# EAGLE board boosterpack_0v1_EAGLE (EAGLE 6.5.0)
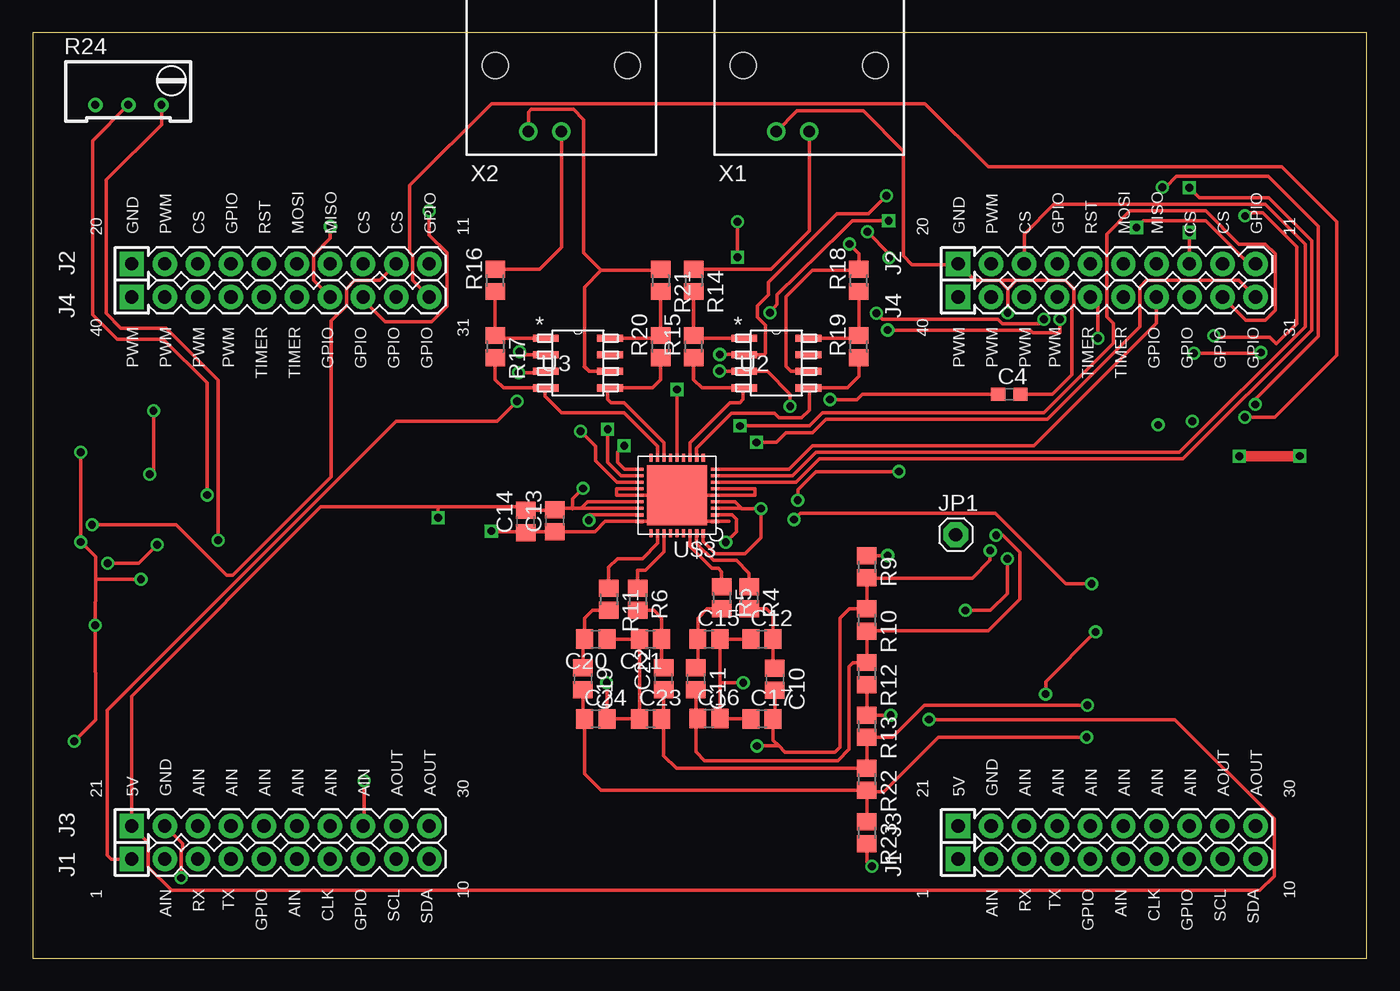
[diagram p0: board, top side]
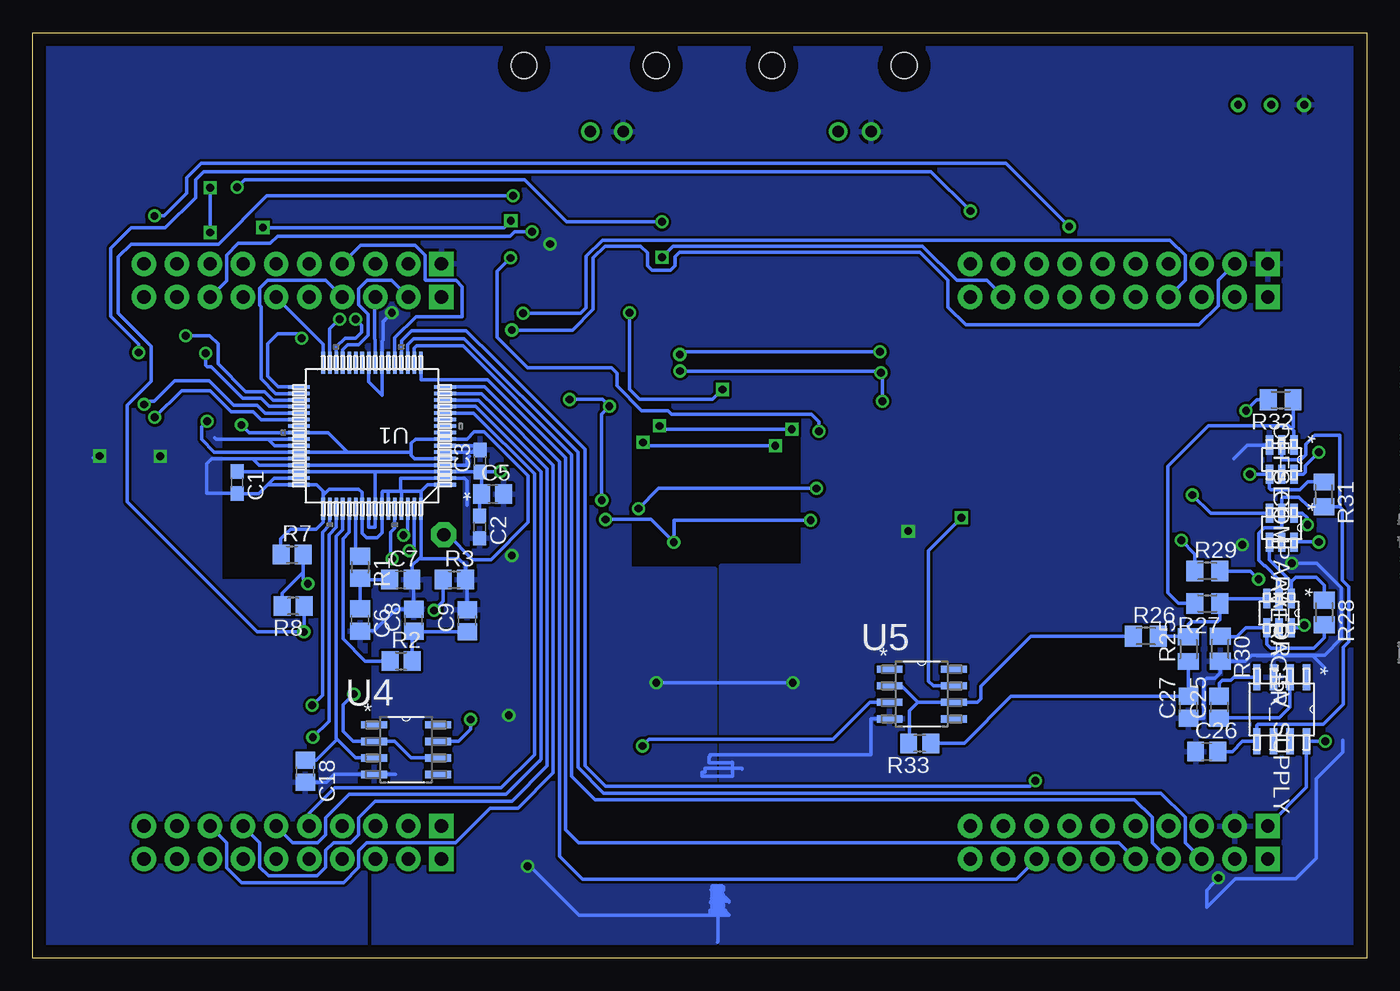
[diagram p1: board, bottom side, seen from below]

Size 102.54 x 71.11 mm. Coordinates in mm from the lower left corner, seen from the top.
Outline: 0,0 102.54,0 102.54,71.11 0,71.11 0,0
Copper layers (1*16): Top 0.035mm / dielectric 1.5mm / Bottom 0.035mm
Design rules "default *": minimum track width 8mil, minimum drill 0.599440625mm, track to track 8mil, track to pad 8mil, pad to pad 8mil, via to via 8mil, smd to smd 8mil, copper to edge 40mil, drill to drill 8mil, minimum pad ring 10mil, minimum via ring 8mil, stop-mask expansion 4mil, vias tented up to drill 0mil, thermal gap 10mil

## Footprints (pad centres in the part's own frame; a part is rotated, then mirrored left to right if it is on the bottom)
D8 = smd 1.981 x 0.559: 1 -2.464,1.905; 2 -2.464,0.635; 3 -2.464,-0.635; 4 -2.464,-1.905; 5 2.464,-1.905; 6 2.464,-0.635; 7 2.464,0.635; 8 2.464,1.905
4X10-BOOSTERPACK = drill 1.016 pad 1.88 square: 1 0,10.16; 20 45.72,10.16; 21 2.54,10.16; 40 43.18,10.16 | drill 1.016 pad 1.88: 2 0,7.62; 3 0,5.08; 4 0,2.54; 5 0,0; 6 0,-2.54; 7 0,-5.08; 8 0,-7.62; 9 0,-10.16; 10 0,-12.7; 11 45.72,-12.7; 12 45.72,-10.16; 13 45.72,-7.62; 14 45.72,-5.08; 15 45.72,-2.54; 16 45.72,0; 17 45.72,2.54; 18 45.72,5.08; 19 45.72,7.62; 22 2.54,7.62; 23 2.54,5.08; 24 2.54,2.54; 25 2.54,0; 26 2.54,-2.54; 27 2.54,-5.08; 28 2.54,-7.62; 29 2.54,-10.16; 30 2.54,-12.7; 31 43.18,-12.7; 32 43.18,-10.16; 33 43.18,-7.62; 34 43.18,-5.08; 35 43.18,-2.54; 36 43.18,0; 37 43.18,2.54; 38 43.18,5.08; 39 43.18,7.62
DBV6 = smd 1.473 x 0.559: 1 -1.118,0.94; 2 -1.118,0; 3 -1.118,-0.94; 4 1.118,-0.94; 5 1.118,0; 6 1.118,0.94
C0603 = smd 1.1 x 1: 1 -0.85,0; 2 0.85,0
C0805 = smd 1.3 x 1.5: 1 -0.85,0; 2 0.85,0
1X01 = drill 1.016 pad 1.93 octagon: 1 0,0
R0805 = smd 1.3 x 1.5: 1 -0.85,0; 2 0.85,0
RTRIM64W = drill 0.61: 1 1.27,-2.54; 2 1.27,0; 3 1.27,2.54
M0805 = smd 1.3 x 1.6: 1 -0.95,0; 2 0.95,0
PAG64 = smd 1.676 x 0.279: 1 -5.613,3.759; 2 -5.613,3.251; 3 -5.613,2.743; 4 -5.613,2.261; 5 -5.613,1.753; 6 -5.613,1.245; 7 -5.613,0.762; 8 -5.613,0.254; 9 -5.613,-0.254; 10 -5.613,-0.762; 11 -5.613,-1.245; 12 -5.613,-1.753; 13 -5.613,-2.261; 14 -5.613,-2.743; 15 -5.613,-3.251; 16 -5.613,-3.759; 33 5.613,-3.759; 34 5.613,-3.251; 35 5.613,-2.743; 36 5.613,-2.261; 37 5.613,-1.753; 38 5.613,-1.245; 39 5.613,-0.762; 40 5.613,-0.254; 41 5.613,0.254; 42 5.613,0.762; 43 5.613,1.245; 44 5.613,1.753; 45 5.613,2.261; 46 5.613,2.743; 47 5.613,3.251; 48 5.613,3.759 | smd 0.279 x 1.676: 17 -3.759,-5.613; 18 -3.251,-5.613; 19 -2.743,-5.613; 20 -2.261,-5.613; 21 -1.753,-5.613; 22 -1.245,-5.613; 23 -0.762,-5.613; 24 -0.254,-5.613; 25 0.254,-5.613; 26 0.762,-5.613; 27 1.245,-5.613; 28 1.753,-5.613; 29 2.261,-5.613; 30 2.743,-5.613; 31 3.251,-5.613; 32 3.759,-5.613; 49 3.759,5.613; 50 3.251,5.613; 51 2.743,5.613; 52 2.261,5.613; 53 1.753,5.613; 54 1.245,5.613; 55 0.762,5.613; 56 0.254,5.613; 57 -0.254,5.613; 58 -0.762,5.613; 59 -1.245,5.613; 60 -1.753,5.613; 61 -2.261,5.613; 62 -2.743,5.613; 63 -3.251,5.613; 64 -3.759,5.613
SOIC127P600X175-8N = smd 1.981 x 0.559: 1 -2.464,1.905; 2 -2.464,0.635; 3 -2.464,-0.635; 4 -2.464,-1.905; 5 2.464,-1.905; 6 2.464,-0.635; 7 2.464,0.635; 8 2.464,1.905
WQFN-36-NJK = smd 0.6 x 0.25: P$1 -2.9,2; P$2 -2.9,1.5; P$3 -2.9,1; P$4 -2.9,0.5; P$5 -2.9,0; P$6 -2.9,-0.5; P$7 -2.9,-1; P$8 -2.9,-1.5; P$9 -2.9,-2; P$19 2.9,-2; P$20 2.9,-1.5; P$21 2.9,-1; P$22 2.9,-0.5; P$23 2.9,0; P$24 2.9,0.5; P$25 2.9,1; P$26 2.9,1.5; P$27 2.9,2 | smd 0.25 x 0.6: P$10 -2,-2.9; P$11 -1.5,-2.9; P$12 -1,-2.9; P$13 -0.5,-2.9; P$14 0,-2.9; P$15 0.5,-2.9; P$16 1,-2.9; P$17 1.5,-2.9; P$18 2,-2.9; P$28 2,2.9; P$29 1.5,2.9; P$30 1,2.9; P$31 0.5,2.9; P$32 0,2.9; P$33 -0.5,2.9; P$34 -1,2.9; P$35 -1.5,2.9; P$36 -2,2.9 | smd 4.6 x 4.6: TH 0,0
AMP_227161 = drill 0.9 pad 1.27: 1 0,-5.08; 2 -2.54,-5.08 | hole 2: -5.08,0; 5.08,0

## Placement (x,y rotation side)
-5V_SUPPLY  TL7660_D_8  [D8]  6.55,19.13 270 bottom
A1  [4X10-BOOSTERPACK]  81.28,7.62 90 top
A2  [4X10-BOOSTERPACK]  17.78,7.62 90 top
AVERAGER  OPA890_DBV_6  [DBV6]  6.76,26.52 270 bottom
C1  0.1uF  [C0603]  86.82,36.55 270 bottom
C2  0.1uF  [C0603]  68.17,33.12 270 bottom
C3  0.1uF  [C0603]  68.15,38.2 90 bottom
C4  0.1uF  [C0603]  75.06,43.33 0 top
C5  10u  [C0805]  67.18,35.66 0 bottom
C6  0.1u  [C0805]  77.37,25.98 270 bottom
C7  2.2u  [C0805]  74.24,29.08 0 bottom
C8  0.1u  [C0805]  73.25,25.96 90 bottom
C9  2.2u  [C0805]  69.14,25.93 90 bottom
C10  1000p  [C0805]  57.05,21.44 270 top
C11  1000p  [C0805]  50.98,21.46 270 top
C12  1000p  [C0805]  56.06,24.51 0 top
C13  1000p  [C0805]  40.13,33.6 90 top
C14  1000p  [C0805]  37.9,33.55 90 top
C15  1000p  [C0805]  51.97,24.51 0 top
C16  1000p  [C0805]  51.97,18.41 0 top
C17  1000p  [C0805]  56.06,18.39 0 top
C18  0.1u  [C0805]  81.58,14.38 270 bottom
C19  1000p  [C0805]  42.29,21.46 270 top
C20  1000p  [C0805]  43.28,24.51 180 top
C21  1000p  [C0805]  47.5,24.51 180 top
C22  1000p  [C0805]  48.49,21.46 90 top
C23  1000p  [C0805]  47.5,18.39 0 top
C24  1000p  [C0805]  43.28,18.39 0 top
C25  10uf  [C0805]  11.35,19.28 90 bottom
C26  10uf  [C0805]  12.32,15.88 0 bottom
C27  1000p  [C0805]  13.72,19.28 90 bottom
COMPARATOR  OPA890_DBV_6  [DBV6]  6.55,33.07 270 bottom
JP1  [1X01]  70.94,32.54 0 top
OFFSET  OPA890_DBV_6  [DBV6]  6.55,38.3 270 bottom
R1  2  [R0805]  77.37,30.05 270 bottom
R2  2  [R0805]  74.22,22.83 0 bottom
R3  56k  [R0805]  70.13,29.08 0 bottom
R4  50  [R0805]  55.07,27.69 270 top
R5  50  [R0805]  52.96,27.69 270 top
R6  50  [R0805]  46.51,27.58 270 top
R7  1k  [R0805]  82.6,31.01 0 bottom
R8  200  [R0805]  82.52,27.05 180 bottom
R9  75  [R0805]  64.11,30.07 270 top
R10  300  [R0805]  64.11,25.98 270 top
R11  50  [R0805]  44.27,27.58 270 top
R12  75  [R0805]  64.11,21.87 270 top
R13  75  [R0805]  64.11,17.83 270 top
R14  1k  [R0805]  50.8,52.07 270 top
R15  1k  [R0805]  50.8,46.99 90 top
R16  1k  [R0805]  35.56,52.07 90 top
R17  1k  [R0805]  35.56,46.99 270 top
R18  1k  [R0805]  63.5,52.07 90 top
R19  1k  [R0805]  63.5,46.99 90 top
R20  1k  [R0805]  48.26,46.99 90 top
R21  1k  [R0805]  48.26,52.07 270 top
R22  300  [R0805]  64.11,13.74 270 top
R23  75  [R0805]  64.11,9.65 270 top
R24  10k  [RTRIM64W]  7.37,66.83 270 top
R25  1k  [M0805]  13.72,23.75 90 bottom
R26  1k  [M0805]  16.99,24.74 0 bottom
R27  1k  [M0805]  12.27,27.25 180 bottom
R28  7.5k  [M0805]  3.28,26.57 270 bottom
R29  2.5k  [M0805]  12.27,29.74 0 bottom
R30  10k  [M0805]  11.28,23.77 270 bottom
R31  5k  [M0805]  3.3,35.64 270 bottom
R32  4k  [M0805]  6.63,42.9 180 bottom
R33  100  [R0805]  34.37,16.51 180 bottom
U1  ADS5237_PAG_64  [PAG64]  76.45,40.13 180 bottom
U2  THS4121_D_8  [D8]  57.15,45.72 0 top
U3  THS4121_D_8  [D8]  41.91,45.72 0 top
U4  OPA140AID  [SOIC127P600X175-8N]  73.84,16.03 0 bottom
U5  OPA140AID  [SOIC127P600X175-8N]  34.21,20.29 0 bottom
U$3  LMH6882  [WQFN-36-NJK]  49.53,35.56 180 top
X1  1-227161-0  [AMP_227161]  59.69,68.58 0 top
X2  1-227161-0  [AMP_227161]  40.64,68.58 0 top

## Library data of the parts
-5V_SUPPLY = TL7660; DATASHEETURL: http://www.ti.com/lit/gpn/TL7660; DESCRIPTION: CMOS Voltage Converter; FAMILY_NAME: LOW POWER; GENERIC_PART_NUMBER: TL7660; INDUSTRY_STD_PKG_TYPE: SOIC; MANUFACTURER: Texas Instruments; MANUFACTURER_PART_NUMBER: tl7660_d_8; PACKAGE_DESIGNATOR: D; PIN_COUNT: 8; VENDOR: Texas Instruments
A1 A2 = EAGLE_BoosterPack_Library
AVERAGER COMPARATOR OFFSET = OPA890; DATASHEETURL: http://www.ti.com/lit/gpn/OPA890; DESCRIPTION: Low Power, Wideband, Voltage Feedback Operational Amplifier with Disable; FAMILY_NAME: VOLTAGE FEEDBACK; GENERIC_PART_NUMBER: OPA890; INDUSTRY_STD_PKG_TYPE: SOT-23; MANUFACTURER: Texas Instruments; MANUFACTURER_PART_NUMBER: opa890_dbv_6; PACKAGE_DESIGNATOR: DBV; PIN_COUNT: 6; VENDOR: Texas Instruments
C1-C4 JP1 = adafruit
C5 = resistor; C: 10uF
C6-C17 C19-C27 R1-R33 = resistor
C18 = resistor; C: 0.1uF
U1 = ADC; DATASHEETURL: http://www.ti.com/lit/gpn/ADS5237; DESCRIPTION: Dual, 10-Bit, 65MSPS, +3.3V Analog-to-Digital Converter; FAMILY_NAME: HIGH SPEED ADC (>10MSPS); GENERIC_PART_NUMBER: ADS5237; INDUSTRY_STD_PKG_TYPE: TQFP; MANUFACTURER: Texas Instruments; PACKAGE_DESIGNATOR: PAG; PIN_COUNT: 64
U2 U3 = ADC; DATASHEETURL: http://www.ti.com/lit/gpn/THS4121; DESCRIPTION: 3.3 V, 100 MHz, 43 V/us, Fully Differential CMOS Amplifier; FAMILY_NAME: FULLY DIFFERENTIAL AMPLIFIER; GENERIC_PART_NUMBER: THS4121; INDUSTRY_STD_PKG_TYPE: SOIC; MANUFACTURER: Texas Instruments; MANUFACTURER_PART_NUMBER: ths4121_d_8; PACKAGE_DESIGNATOR: D; PIN_COUNT: 8; VENDOR: Texas Instruments
U4 U5 = Texas Instruments_By_element14_Batch_1; MPN: OPA140AID; OC_FARNELL: 1855117; OC_NEWARK: 13T8920; PACKAGE: SOIC-8; SUPPLIER: Texas Instruments
U$3 = lmh6882
X1 X2 = con-coax; MF: TYCO ELECTRONICS; MPN: 1-227161; OC_FARNELL: unknown; OC_NEWARK: 33B3200

## Nets
3.3V: A2.1 C1.1 C2.1 C3.1 C4.1 C5.1 U1.3 U1.46 U1.56 U1.57 U2.3 U3.3
A0: A1.25 U1.12
A1: A1.26 U1.13
A2: A1.27 U1.14
A3: A1.28 U1.15
A4: A2.8 U1.16
A5: A2.5 U1.17
A6: A2.4 U1.18
A7: A2.3 U1.19
A8: A2.28 U1.20
A9: A1.17 U1.21
B0: A1.39 U1.29
B1: A2.37 U1.30
B2: A2.19 U1.31
B3: A1.35 U1.32
B4: A1.36 U1.33
B5: A1.37 U1.34
B6: A2.34 U1.35
B7: A2.33 U1.36
B8: A2.32 U1.37
B9: A2.31 U1.38
C0: A1.11 U$3.P$14
C1: A1.13 U$3.P$7
C2: A1.18 U$3.P$8
C3: A1.34 U$3.P$9
C4: A1.33 U$3.P$21
C5: A1.32 U$3.P$20
C6: A1.31 U$3.P$19
GND: -5V_SUPPLY.3 A1.20 A2.20 A2.22 C1.2 C2.2 C3.2 C4.2 C5.2 C6.2 C7.2 C8.2 C9.2 C12.1 C13.1 C14.1 C15.2 C16.2 C17.1 C18.2 C20.1 C21.2 C23.1 C24.2 C26.1 C27.1 OFFSET.3 R3.2 R7.1 R9.1 R12.2 R13.1 R18.2 R21.1 R23.2 R24.1 R30.2 U1.1 U1.2 U1.4 U1.6 U1.7 U1.23 U1.25 U1.41 U1.42 U1.44 U1.45 U1.47 U1.48 U1.49 U1.55 U1.58 U1.59 U1.61 U1.64 U2.6 U3.6 U4.4 U5.4 U$3.P$1 U$3.P$5 U$3.P$6 U$3.P$22 U$3.P$23 U$3.P$27 U$3.TH X1.2 X2.2
N$1: A1.38 U1.24
N$2: JP1.1 U1.5 U1.8 U1.40 U1.43
N$3: C18.1 U1.52 U4.3
N$4: C19.2 C24.1 R22.2 R23.1 U1.51
N$5: R24.3 R29.1
N$6: COMPARATOR.3 R24.2
N$7: AVERAGER.4 R28.2 R30.1
N$8: C11.1 C15.1 R5.2
N$9: R8.1 U2.2 U3.2 U4.2 U4.6
N$10: R7.2 R8.2 U$3.P$2 U$3.P$26
N$11: AVERAGER.3 R25.2 R26.2 R27.1
N$13: C11.2 C16.1 R10.2 R12.1 U1.62
N$14: C21.1 C22.2 R6.2
N$15: C19.1 C20.2 R11.2
N$16: AVERAGER.1 COMPARATOR.4 R28.1
N$17: C22.1 C23.2 R13.2 R22.1 U1.50
N$18: OFFSET.1 R27.2 R32.1
N$20: OFFSET.4 R31.1 R32.2
N$21: R5.1 U$3.P$34
N$22: R26.1 R33.2 U5.2 U5.6
N$23: -5V_SUPPLY.2 C25.1
N$24: -5V_SUPPLY.4 C25.2
N$25: -5V_SUPPLY.5 AVERAGER.2 C26.2 COMPARATOR.2 OFFSET.2 R31.2
N$26: C10.2 C17.2 R9.2 R10.1 U1.63 U5.3
N$27: R4.1 U$3.P$35
N$29: C6.1 C7.1 R1.2
N$30: C8.1 C9.1 R2.2
N$31: R1.1 U1.54
N$32: R2.1 U1.53
N$33: R3.1 U1.60
N$34: R14.1 X1.1
N$41: R6.1 U$3.P$30
N$42: R14.2 R15.2 U2.1
N$43: R15.1 U2.4 U$3.P$12
N$44: R16.1 R17.1 U3.1
N$47: R17.2 U3.4 U$3.P$17
N$48: R18.1 R19.2 U2.8
N$49: R20.2 R21.2 U3.8
N$51: R16.2 X2.1
N$59: R20.1 U3.5 U$3.P$16
N$60: R19.1 U2.5 U$3.P$11
N$62: R11.1 U$3.P$29
N$67: C10.1 C12.2 R4.2
OUTPUT: A2.12 COMPARATOR.1
SIGNAL1: C27.2 R25.1 R33.1
VCC: -5V_SUPPLY.8 A2.21 AVERAGER.6 C13.2 C14.2 COMPARATOR.6 OFFSET.6 R29.2 U4.7 U5.7 U$3.P$3 U$3.P$4 U$3.P$24 U$3.P$25 U$3.P$36

## Tracks (layer width: path | path; a pad name or v marks a point on that pad's centre or on a via)
3.3V  (via drill 0.6)
  Top 0.254: A2.1 6.04,7.62 5.74,7.93 5.74,19.05 27.94,41.25 35.69,41.25 v37.24,42.8 | v37.34,44.98 39.34,44.98 U3.3 | v52.78,45.11 52.81,45.09 U2.3 56.46,45.09 58.22,43.33 v58.22,42.39 | v61.27,42.93 61.29,42.9 63.35,42.9 63.78,43.33 C4.1 | v66.57,37.39 60.2,37.39 58.8,35.99 v58.8,35.18
  Bottom 0.254: C1.1 86.81,37.39 U1.46 76.2,37.39 | C2.1 68.17,35.52 C5.1 68.03,37.24 C3.1 68.19,37.39 | 68.19,37.39 U1.3 76.2,37.39 | v37.24,42.8 37.24,44.88 v37.34,44.98 37.47,45.11 v52.78,45.11 | U1.57 76.22,34.54 76.2,34.54 U1.57 | U1.57 76.2,33.12 76.71,33.12 U1.56 | 76.2,37.39 U1.57 | v61.27,42.93 58.75,42.93 v58.22,42.39 58.8,41.81 v58.8,35.18 | 68.19,37.39 v66.57,37.39
A0
  Bottom 0.254: A1.25 81.28,11.12 79.32,13.08 66.52,13.08 63.98,15.65 63.98,37.24 68.63,41.88 U1.12
A1
  Bottom 0.254: A1.26 82.55,8.89 80.62,8.89 80.01,9.5 80.01,10.8 78.21,12.6 66.17,12.6 63.76,14.98 | 63.76,14.98 63.55,15.19 | 63.76,14.98 63.48,15.27 63.48,37.39 68.48,42.39 U1.13
A2
  Bottom 0.254: A1.27 85.09,8.89 85.09,7.01 84.4,6.32 80.67,6.32 80.01,6.98 80.01,8.28 79.4,8.89 78.11,8.89 77.5,9.5 77.47,9.5 77.47,10.8 76.2,12.07 65.71,12.07 63.02,14.81 63.02,37.62 68.28,42.88 U1.14
A3
  Bottom 0.254: A1.28 87.63,8.89 87.63,6.96 86.49,5.82 78.64,5.82 77.47,6.98 77.47,8.25 76.86,8.87 76.86,8.89 70.03,8.89 67.39,11.53 65.23,11.53 62.53,14.25 62.53,37.87 67.03,42.39 68.02,43.38 U1.15
A4
  Bottom 0.254: A2.8 26.95,6.07 60.27,6.07 62.05,7.85 62.05,38.12 67.82,43.89 U1.16
A5
  Bottom 0.254: A2.5 19.05,8.89 60.58,8.89 61.57,9.88 61.57,38.43 67.59,44.45 72.69,44.45 U1.17
A6
  Bottom 0.254: A2.4 16.51,8.89 16.51,10.82 17.86,12.17 59.31,12.17 61.11,13.97 61.11,38.68 69.47,47.04 73.03,47.04 73.2,46.86 U1.18
A7
  Bottom 0.254: A2.3 13.97,8.89 13.97,10.82 15.82,12.68 58.65,12.68 60.63,14.66 60.63,38.86 69.37,47.6 73.25,47.6 73.71,47.14 U1.19
A8  (via drill 0.6)
  Top 0.254: v25.48,13.64 25.48,10.24 A2.28
  Bottom 0.254: v25.48,13.64 25.91,13.21 58.52,13.21 60.1,14.78 60.1,39.09 68.05,47.04 68.15,47.14 69.22,48.21 73.41,48.21 74.19,47.42 U1.20
A9
  Bottom 0.254: A1.17 77.32,54.76 73.15,54.76 72.39,54 72.39,52.12 72.34,52.07 70,52.07 69.52,51.59 69.52,49.28 73.08,49.28 74.7,47.65 U1.21
B0
  Bottom 0.254: A1.39 74.93,52.07 76.83,52.07 77.47,51.44 77.47,50.19 76.76,49.48 76.76,47.85 77.47,47.14 78.33,47.14 78.72,46.76 U1.29
B1  (via drill 0.6)
  Top 0.254: v64.85,49.55 65.3,49.1 74.17,49.1 74.52,48.74 77.37,48.74 v77.72,49.1 77.39,48.77
  Bottom 0.254: v77.72,49.1 77.24,48.62 77.24,48.08 77.7,47.62 78.54,47.62 79.2,46.97 U1.30 | v64.85,49.55 60.43,49.55 59.99,49.99 59.99,53.92 58.75,55.17 15.14,55.17 13.97,54 13.97,52.07 A2.37
B2  (via drill 0.6)
  Top 0.254: v78.94,49.1 78.94,48.03 76.89,48.03 76.66,48.26 v65.71,48.26
  Bottom 0.254: U1.31 79.7,48.36 v78.94,49.1 | v65.71,48.26 61.06,48.26 59.46,49.86 59.46,53.8 58.55,54.71 55.83,54.71 55.3,54.18 55.3,53.21 54.94,52.86 53.52,52.86 53.19,53.19 53.19,53.87 52.83,54.23 34.34,54.23 32.18,52.07 32.18,50.01 30.84,48.67 12.9,48.67 11.43,50.14 11.43,52.07 A2.19
B3
  Bottom 0.254: A1.35 83.82,50.77 80.21,47.17 U1.32
B4  (via drill 0.6)
  Top 0.254: v81.86,47.62 81.86,50.22 A1.36
  Bottom 0.254: U1.33 83.67,43.89 84.48,44.7 84.48,47.19 83.69,47.98 82.22,47.98 v81.86,47.62
B5
  Bottom 0.254: U1.34 83.84,43.38 84.96,44.5 84.96,50.04 85.09,50.16 85.09,51.46 84.48,52.07 80.01,52.07 A1.37
B6  (via drill 0.6)
  Top 0.254: v93.17,57.02 93.4,57.25 94.54,57.25 97.13,54.66 97.13,48.74 95.58,47.19 95.07,47.7 90.91,47.7 v90.78,47.83 | v22.89,56.21 22.89,55.3 21.59,54 21.59,52.07 A2.34
  Bottom 0.254: v90.78,47.83 88.92,47.83 88.29,47.19 88.29,45.67 86.16,43.54 84.71,43.54 84.05,42.88 U1.35 | v93.17,57.02 92.43,57.02 90.7,58.75 90.7,59.94 89.59,61.06 27.74,61.06 v22.89,56.21
B7  (via drill 0.6)
  Top 0.254: v89.23,46.48 94.34,46.48 v94.39,46.53 | v30.48,57.4 30.48,55.55 31.85,54.18 31.85,50.09 30.66,48.9 27.1,48.9 25.4,50.6 A2.33
  Bottom 0.254: v94.39,46.53 94.39,47.17 96.55,49.33 96.55,54.53 94.97,56.11 92.33,56.11 90.02,58.42 90.02,59.82 89.41,60.43 33.5,60.43 v30.48,57.4 | v89.23,46.48 89.23,45.54 89.13,45.44 88.8,45.44 86.39,43.03 84.99,43.03 84.35,42.39 U1.36
B8  (via drill 0.6)
  Top 0.254: v54.18,53.85 v54.18,56.57 | v86.82,59.23 87.07,59.23 87.91,60.07 94.94,60.07 98.78,56.24 98.78,47.78 93.95,42.95 v93.95,42.55
  Bottom 0.254: A2.32 29.21,52.07 31.52,52.07 34.16,54.71 53.31,54.71 v54.18,53.85 | v54.18,56.57 61.49,56.57 64.72,59.79 86.26,59.79 v86.82,59.23 | v93.95,42.55 93.7,42.8 93.19,42.8 91.62,44.37 88.95,44.37 87.07,42.49 85.27,42.49 84.66,41.88 U1.37
B9  (via drill 0.6)
  Top 0.254: A2.31 29.21,52.07 29.21,54 28.98,54.23 28.98,59.38 35.26,65.66 68.58,65.66 73.43,60.81 96.01,60.81 100.23,56.59 100.23,46.33 95.45,41.55 v93.14,41.55
  Bottom 0.254: v93.14,41.55 91.08,43.61 88.9,43.61 87.27,41.99 85.57,41.99 84.96,41.38 U1.38
C0  (via drill 0.6)
  Top 0.254: A1.11 93.47,53.34 90.17,56.64 85.34,56.64 v84.84,56.13 | v49.53,43.69 U$3.P$14 | v56.67,49.58 57.2,50.24 57.2,50.98 62.23,55.88 62.99,56.64 v65.79,56.64
  Bottom 0.254: v84.84,56.13 66.29,56.13 v65.79,56.64 | v49.53,43.69 50.29,42.93 55.88,42.93 56.67,43.71 v56.67,49.58
C1  (via drill 0.6)
  Top 0.254: U$3.P$7 58.66,36.56 60.45,38.35 88.39,38.35 98.3,48.26 98.3,55.12 95,58.42 89.66,58.42 v88.9,59.18 | v88.9,55.75 A1.13
  Bottom 0.254: v88.9,59.18 v88.9,55.75
C2
  Top 0.254: U$3.P$8 58.4,37.06 60.2,38.86 88.14,38.86 97.79,48.51 97.79,54.86 94.74,57.91 78.49,57.91 76.2,55.63 A1.18
C3
  Top 0.254: U$3.P$9 58.13,37.56 59.94,39.37 76.96,39.37 86.36,48.77 A1.34
C4  (via drill 0.6)
  Top 0.254: U$3.P$21 44.92,36.56 43.26,38.23 43.26,39.34 v42.11,40.49 | v65.81,53.8 65.81,54.1 v64.16,55.8
  Bottom 0.254: v42.11,40.49 42.11,41.2 42.7,41.78 53.44,41.78 53.72,42.06 55.73,42.06 57.63,43.97 57.63,44.96 58.04,45.36 64.52,45.36 66.85,47.7 66.85,52.76 v65.81,53.8 | v64.16,55.8 65.51,55.8 65.84,55.47 83.72,55.47 84.28,54.91 86.74,54.91 87.63,54 87.63,52.05 A1.33
C5  (via drill 0.6)
  Top 0.254: U$3.P$20 45.24,37.06 44.2,38.1 v44.2,40.64 | v54.36,40.89 59.69,40.89 60.71,41.91 77.72,41.91 83.06,47.24 83.06,48.77 82.55,49.28 82.55,55.63 84.33,57.4 90.17,57.4 92.71,54.86 94.74,54.86 95.5,54.1 95.5,49.78 94.74,49.02 93.22,49.02 A1.32
  Bottom 0.254: v44.2,40.64 54.1,40.64 v54.36,40.89
C6  (via drill 0.6)
  Top 0.254: U$3.P$19 45.5,37.56 44.96,38.1 44.96,38.86 v45.47,39.37 | A1.31 92.71,52.07 85.6,52.07 85.09,51.56 85.09,48.51 77.98,41.4 60.96,41.4 59.94,40.39 57.91,40.39 57.15,39.62 v55.63,39.62
  Bottom 0.254: v45.47,39.37 55.37,39.37 v55.63,39.62
GND  (via drill 0.6)
  Top 0.254: 43.69,52.83 42.42,51.56 42.42,45.47 42.8,45.09 U3.6 42.75,45.09 42.39,45.44 | 43.69,52.83 48.17,52.83 R21.1 | U2.6 58.29,45.09 57.91,45.47 57.91,50.8 59.94,52.83 63.41,52.83 R18.2 63.5,54.13 v62.76,54.86 | 49.03,36.06 U$3.TH | U$3.TH 50.04,35.05 48.55,33.56 U$3.P$27 44,33.56 43.2,32.77 40.14,32.77 C13.1 37.95,32.75 C14.1 37.9,32.77 35.26,32.77 | 50.03,36.06 49.89,35.92 | 49.89,35.92 U$3.TH | 51.53,33.56 51.13,33.96 | 51.13,33.96 U$3.TH | C20.1 C21.2 C23.1 C24.2 44.13,21.15 v44.12,21.16 | C12.1 C15.2 52.82,21.08 | 52.82,21.08 C16.2 52.84,18.39 C17.1 | R12.2 R13.1 65.93,18.68 v65.94,18.67 | v54.61,21.16 52.9,21.16 52.82,21.08 | R9.1 65.26,30.92 v65.71,30.94 | v92.73,38.56 92.81,38.56 92.84,38.58 | X2.2 38.1,65 38.3,65.2 41.55,65.2 42.34,64.41 42.34,54.18 43.69,52.83 | v5.77,30.35 8.15,30.35 v9.58,31.77 | A2.22 11.53,8.79 11.53,8.38 11.43,8.28 v11.43,6.17 | U$3.P$1 53.52,33.56 53.52,33.55 51.13,33.55 51.13,33.96 | U$3.TH U$3.P$23 44.86,35.56 44.86,36.06 U$3.P$22 | U$3.TH 49.89,35.56 49.89,35.92 | U$3.P$6 55.52,36.06 55.52,35.56 U$3.P$5 U$3.TH | 74.93,51.41 74.3,52.07 72.39,52.07 A1.20 | v74.93,49.58 74.93,51.41 | C4.2 78.38,43.33 79.88,44.83 79.88,50.04 80.01,50.16 80.01,51.41 | 80.01,51.41 80.01,51.44 79.35,52.07 | 79.35,52.07 75.62,52.07 | 75.62,52.07 74.93,51.41 | 80.01,51.41 79.35,52.07 | 75.62,52.07 72.42,52.07 71.2,53.29 67.59,53.29 66.93,53.95 66.93,62 63.83,65.1 58.75,65.1 X1.2 | 64.14,7.42 64.14,8.78 R23.2 64.11,7.44 v64.49,7.06 64.14,7.42
  Top 0.406: 35.26,32.77 v35.26,32.82
  Top 0.813: 92.84,38.58 v97.38,38.58
  Bottom 0.254: v44.12,21.16 v54.61,21.16 | C9.2 69.14,28.94 R3.2 69.28,30.19 69.8,30.71 72.85,30.71 | 72.85,30.71 73.38,30.17 73.38,29.1 C7.2 73.25,28.94 C8.2 74.61,26.81 76.28,25.15 77.36,25.15 C6.2 | 72.85,30.71 72.69,30.86 U1.64 72.69,35.79 | U1.1 72.19,36.37 72.69,35.87 72.69,35.79 | v65.94,18.67 65.96,18.67 | C18.2 81.57,13.51 79.96,13.51 79.35,14.12 U4.4 74.62,14.12 | U1.61 74.19,35.81 | 74.19,35.81 74.14,35.87 72.77,35.87 72.69,35.79 | U1.59 75.21,35.81 75.26,35.87 | U1.49 80.21,35.56 79.73,36.04 77.47,36.04 77.22,35.79 U1.55 77.22,32.66 76.86,32.31 76.07,32.31 75.69,32.69 U1.58 75.69,35.81 75.64,35.87 75.26,35.87 | U1.49 80.21,35.87 80.72,36.37 U1.48 | U1.48 83.26,36.37 | U1.47 83.97,36.88 84.48,36.37 | 84.48,36.37 85.17,35.69 86.8,35.69 C1.2 86.83,35.71 89.15,35.71 89.15,38 88.77,38.38 85.62,38.38 | U1.48 84.48,36.37 | 84.43,39.88 U1.41 | U1.42 83.92,39.37 84.43,39.88 | U1.44 85.62,38.38 | 68.96,38.56 69.14,38.38 69.14,37.87 U1.4 U1.45 85.11,37.87 85.62,38.38 | 68.38,39.29 68.78,38.89 U1.6 | 68.38,39.29 68.38,39.22 68.45,39.14 | 68.45,39.14 68.5,39.09 | 68.38,39.29 68.45,39.37 U1.7 68.68,39.37 68.45,39.14 | v97.38,38.58 97.74,38.58 97.87,38.46 | 74.19,35.81 74.19,35.87 74.27,35.87 | 74.27,35.87 75.26,35.87 | 74.27,35.87 74.27,36.88 U1.2 69.34,36.88 69.14,36.68 69.14,34.8 | 64.59,7.04 64.57,7.06 v64.49,7.06 64.31,7.06 60.55,3.3 49.02,3.3 49.02,3.35 49.2,3.53 50.44,3.53 50.47,3.51 50.47,3.68 50.34,3.81 49.43,3.81 49.3,3.68 49.33,3.66 50.32,3.66 50.34,3.63 50.34,3.96 | v62.76,54.86 62.76,54.84 | OFFSET.3 9.2,39.42 10.24,38.38 | v5.77,30.35 3.86,30.35 1.96,28.45 1.96,24.59 3.25,23.29 8.87,23.29 9.33,22.82 R30.2 11.28,21.95 11.71,21.51 12.32,21.51 12.55,21.29 12.55,18.44 13.7,18.44 C27.1
  Bottom 0.254: v9.58,31.77 9.68,31.88 | 8.48,23.24 4.17,23.24 3.25,22.33 | 1.85,16.76 1.85,15.82 3.89,13.79 3.89,7.7 5.46,6.12 10.11,6.12 12.32,3.91 12.32,5.21 v11.43,6.17 | U5.4 38.12,18.39 38.12,15.62 50.47,15.62 50.47,15.49 50.57,15.49 50.57,15.01 48.84,15.01 48.84,15.06 48.74,15.06 48.74,14 51.08,14 51.08,14.27 50.88,14.27 50.88,14.58 48.03,14.58 48.03,14.53 | 50.34,3.96 50.27,4.04 49.51,4.04 49.43,3.96 49.43,4.12 49.45,4.14 50.32,4.14 50.44,4.27 50.44,4.32 50.39,4.37 49.07,4.37 49.02,4.32 49.02,4.42 49.3,4.7 50.27,4.7 50.37,4.6 50.34,4.57 49.51,4.57 49.43,4.5 49.43,4.85 49.45,4.88 50.24,4.88 50.29,4.93 50.29,5.03 50.27,5.05 49.51,5.05 49.51,5.31 49.53,5.33 50.34,5.33 50.42,5.26 49.48,5.26 49.45,5.23 49.45,5.49 49.55,5.59 50.29,5.59 50.34,5.54 50.34,3.96 | 50.34,3.96 49.86,3.48 49.86,1.29 49.91,1.25 | 84.43,39.88 88.44,39.88 88.54,39.98 | U1.49 80.21,33.5 80.75,32.97 82.7,32.97 83.46,32.21 83.46,31.03 R7.1 | 75.62,48.87 75.62,47.47 75.69,47.4 U1.23 75.69,43.26 76.71,44.27 U1.25 | 75.62,48.87 v74.93,49.58 | 75.62,48.87 75.62,48.92 74.93,49.61
  Bottom 0.406: v35.26,32.82 35.23,32.82 arc90 35.2,32.79
  pour Bottom: 0.66,70.69 0.66,0.43 49.58,0.43 49.58,30.12 43.31,30.12 43.31,42.24 56.72,42.24 56.72,29.9 50.14,29.9 50.14,0.33 76.3,0.33 76.3,29.13 69.27,29.13 69.27,46.71 88.16,46.71 88.16,28.91 76.99,28.91 76.99,0.43 101.93,0.43 101.93,70.69
N$1
  Bottom 0.254: U1.24 76.2,47.52 76.25,47.57 76.25,50.75 A1.38
N$2  (via drill 0.6)
  Bottom 0.254: 73.43,38.86 73.43,39.55 73.1,39.88 U1.8 69.16,39.88 68.61,40.44 67.84,40.44 64.47,37.06 64.47,33.48 67.31,30.63 68.71,30.63 70.61,32.54 JP1.1 | 73.43,38.86 73.43,38.63 73.18,38.38 U1.5 | 78.33,38.89 U1.43 88.59,38.89 89.56,39.85 89.56,40.82 v89.13,41.25 | 78.33,38.89 73.46,38.89 73.43,38.86 | v86.49,40.97 85.9,40.39 U1.40 79.83,40.39 78.33,38.89
N$3
  Bottom 0.254: U1.52 78.72,32.92 79.22,32.41 79.22,16.92 79.15,16.84 | 79.15,16.84 77.7,15.39 U4.3 | C18.1 80.76,15.23 79.15,16.84
N$4  (via drill 0.6)
  Top 0.254: C19.2 42.29,18.53 C24.1 42.43,14.16 43.69,12.9 63.6,12.9 | R23.1 R22.2 64.1,12.9 63.6,12.9 | v81,16.97 69.6,16.97 65.43,12.8 63.7,12.8 63.6,12.9
  Bottom 0.254: U1.51 79.2,33.1 79.76,32.54 79.76,18.21 v81,16.97
N$5  (via drill 0.6)
  Top 0.254: v14.28,32.11 14.28,44.4 10.26,48.41 6.78,48.41 5.66,49.53 5.66,59.79 9.91,64.03 R24.3
  Bottom 0.254: R29.1 13.22,31.05 v14.28,32.11
N$6  (via drill 0.6)
  Top 0.254: v13.41,35.59 13.41,44.2 10.06,47.55 6.5,47.55 4.62,49.43 4.62,62.81 R24.2
  Bottom 0.254: COMPARATOR.3 12.01,34.19 v13.41,35.59
N$7
  Bottom 0.254: R30.1 11.27,24.71 10.01,24.71 9.32,25.4 AVERAGER.4 7.7,24.13 7.39,23.83 4.09,23.83 3.28,24.64 R28.2
N$8
  Top 0.254: R5.2 51.83,26.84 51.13,26.14 51.13,24.52 | 51.13,24.52 C15.1 | 51.13,24.52 51.13,22.47 C11.1
N$9  (via drill 0.6)
  Top 0.254: v77.85,20.3 77.85,21.23 v81.69,25.07 | U3.2 37.64,46.35 v37.41,46.58 | v52.81,46.38 54.66,46.38 U2.2 56.24,46.35 56.34,46.46 56.34,48.62 55.7,49.25 55.7,50.11 56.57,50.98 56.57,51.94 61.82,57.2 64.24,57.2 v65.61,58.57
  Bottom 0.254: U4.6 73.46,15.39 74.73,16.66 U4.2 77.9,16.66 78.69,17.45 78.69,19.46 v77.85,20.3 | R8.1 81.69,27.04 v81.69,25.07 85.27,25.07 95.28,35.08 95.28,42.47 93.42,44.32 93.42,47.02 95.96,49.55 95.96,53.87 94.97,54.86 88.24,54.86 84.53,58.57 v65.61,58.57 | v37.41,46.58 52.6,46.58 v52.81,46.38
N$10  (via drill 0.6)
  Top 0.254: v81.38,28.78 79.4,28.78 73.99,34.19 59,34.19 v58.52,33.71 | 53.26,32 v53.26,31.95 54.08,32.77 54.08,33.73 53.75,34.06 U$3.P$2 | U$3.P$26 42.75,34.06 v42.75,33.66
  Bottom 0.254: R8.2 83.36,27.06 83.36,28.04 81.75,29.65 R7.2 81.75,29.15 v81.38,28.78 | v58.52,33.71 55.02,33.71 v53.26,31.95 53.26,33.66 v42.75,33.66
N$11
  Bottom 0.254: R26.2 13.76,24.74 R25.2 13.72,25.65 13.54,25.83 11.51,25.83 11.32,26.02 R27.1 10.94,27.63 AVERAGER.3
N$13  (via drill 0.6)
  Top 0.254: C16.1 50.98,18.56 C11.2 50.98,15.85 51.64,15.19 61.87,15.19 62.74,16.05 62.74,22.4 63.04,22.71 64.1,22.71 R12.1 R10.2 64.12,25.15 73.43,25.15 75.87,27.58 75.87,31.19 74.57,32.49 v74.04,32.49
  Bottom 0.254: U1.62 73.71,32.49 v74.04,32.49
N$14
  Top 0.254: R6.2 47.74,26.73 48.34,26.14 48.34,24.52 C21.1 48.35,22.45 C22.2
N$15
  Top 0.254: R11.2 43.03,26.72 42.43,26.12 C20.2 42.29,24.37 C19.1
N$16
  Bottom 0.254: R28.1 3.28,28.65 3.91,29.29 5.46,29.29 5.82,28.93 | 5.82,28.93 AVERAGER.1 | COMPARATOR.4 7.49,30.61 5.82,28.93
N$17  (via drill 0.6)
  Top 0.254: C22.1 48.49,18.53 | 48.49,18.53 C23.2 | 48.49,18.53 48.49,15.57 49.48,14.58 64.1,14.58 R22.1 R13.2 64.12,16.99 66.09,16.99 68.53,19.43 v81.05,19.43
  Bottom 0.254: U1.50 79.7,33.3 80.26,32.74 80.26,20.22 v81.05,19.43
N$18
  Bottom 0.254: R27.2 14.48,27.25 15.32,28.09 15.32,37.8 12.19,40.92 6.02,40.92 5.79,40.69 | 5.79,40.69 5.61,40.51 OFFSET.1 | R32.1 5.68,40.8 5.79,40.69
N$20  (via drill 0.6)
  Top 0.254: v9.3,42.06 9.3,37.49 v8.99,37.19
  Bottom 0.254: R31.1 4.56,36.59 5.16,35.99 7.39,35.99 7.49,36.09 OFFSET.4 v8.99,37.19 | R32.2 8.46,42.9 v9.3,42.06
N$21
  Top 0.254: U$3.P$34 50.53,31.64 52.22,29.95 52.7,29.95 52.96,29.69 R5.1
N$22
  Bottom 0.254: 34.49,19.66 U5.6 29.95,19.66 29.67,19.94 29.67,20.9 25.83,24.74 R26.1 | 34.49,19.66 35.15,19 35.15,16.57 R33.2 | U5.2 35.76,20.93 34.49,19.66
N$23
  Bottom 0.254: -5V_SUPPLY.2 5.92,19.28 6.73,18.47 11.32,18.47 C25.1
N$24
  Bottom 0.254: -5V_SUPPLY.4 10.24,21.59 10.46,21.36 11.12,21.36 11.35,21.13 C25.2
N$25
  Bottom 0.254: C26.2 10.36,15.88 9.58,16.66 -5V_SUPPLY.5 8.46,17.91 8.38,17.98 3.35,17.98 1.83,19.51 1.83,23.88 1.4,24.31 1.4,28.55 1.91,29.06 1.91,34.49 2.11,34.7 | AVERAGER.2 6.76,29.08 7.82,30.15 7.87,30.15 8.31,30.58 8.31,32.66 7.9,33.07 6.63,33.07 6.55,33.15 COMPARATOR.2 6.55,35.33 6.45,35.43 5.23,35.43 4.49,34.69 R31.2 2.11,34.7 | OFFSET.2 6.55,38.3 5.08,38.3 4.7,38.68 4.7,39.5 4.01,40.18 2.11,40.18 2.11,34.7
N$26  (via drill 0.6)
  Top 0.254: C10.2 57.05,18.53 C17.2 56.9,18.38 56.9,16.76 57.35,16.31 | 57.35,16.31 57.84,15.82 61.67,15.82 62.05,16.21 62.05,26.11 62.77,26.83 R10.1 R9.2 64.22,29.11 64.67,29.11 64.75,29.19 72.21,29.19 73.58,30.56 v73.58,31.32 | v55.68,16.31 57.35,16.31
  Bottom 0.254: U1.63 73.2,31.5 73.41,31.5 v73.58,31.32 | U5.3 38.2,19.66 41.05,16.82 55.17,16.82 v55.68,16.31
N$27
  Top 0.254: U$3.P$35 51.03,31.85 52.32,30.56 54.1,30.56 55.07,29.59 R4.1
N$29
  Bottom 0.254: C7.1 77.25,29.08 R1.2 C6.1
N$30
  Bottom 0.254: C9.1 73.23,25.08 C8.1 73.37,24.99 R2.2
N$31
  Bottom 0.254: U1.54 77.7,31.23 R1.1
N$32
  Bottom 0.254: U1.53 78.21,32.72 78.69,32.23 78.69,24.54 76.99,22.84 R2.1
N$33  (via drill 0.6)
  Top 0.254: v71.68,26.72 73.61,26.72 74.91,28.02 v74.91,30.68
  Bottom 0.254: R3.1 70.98,27.42 v71.68,26.72 | U1.60 74.7,33.05 75.01,32.74 75.01,30.79 v74.91,30.68
N$34
  Top 0.254: R14.1 56.73,52.92 59.69,55.88 X1.1
N$41
  Top 0.254: U$3.P$30 48.53,31.23 47.09,29.79 46.51,29.79 R6.1
N$42
  Top 0.254: R14.2 R15.2 51.02,47.62 U2.1
N$43
  Top 0.254: R15.1 50.8,44.45 51.44,43.81 U2.4 54.61,43.74 54.61,42.93 54.36,42.67 53.59,42.67 50.53,39.61 U$3.P$12
N$44
  Top 0.254: R16.1 R17.1 35.77,47.62 U3.1
N$47
  Top 0.254: R17.2 35.56,44.45 36.2,43.81 U3.4 39.37,43.74 39.37,43.18 40.64,41.91 45.47,41.91 48.03,39.35 U$3.P$17
N$48
  Top 0.254: U2.8 63.28,47.62 R19.2 R18.1
N$49
  Top 0.254: R21.2 R20.2 48.05,47.62 U3.8
N$51
  Top 0.254: X2.1 40.64,54.61 38.95,52.92 R16.2
N$59
  Top 0.254: R20.1 48.26,44.45 47.62,43.81 U3.5 44.2,43.64 44.2,42.93 44.45,42.67 45.47,42.67 48.53,39.61 U$3.P$16
N$60
  Top 0.254: R19.1 63.5,44.7 62.61,43.81 U2.5 59.69,43.74 59.69,42.11 59.08,41.5 57.35,41.5 57,41.86 53.72,41.86 51.03,39.17 U$3.P$11
N$62
  Top 0.254: U$3.P$29 48.03,31.88 46.86,30.71 44.96,30.71 44.27,30.02 R11.1
N$67
  Top 0.254: R4.2 56.4,26.84 56.9,26.34 56.9,24.52 | 56.9,24.52 C12.2 | 56.9,24.52 56.9,22.44 C10.1
OUTPUT  (via drill 0.6)
  Top 0.254: v4.57,33.3 11.05,33.3 14.94,29.41 15.37,29.41 22.96,37.01 22.96,48.97 24.13,50.14 24.13,51.44 24.77,52.07 26.67,52.07 A2.12
  Bottom 0.254: COMPARATOR.1 4.95,34.19 4.6,33.83 4.6,33.33 v4.57,33.3
SIGNAL1
  Bottom 0.254: R25.1 C27.2 27.34,20.13 30.94,16.54 33.49,16.54 R33.1
VCC  (via drill 0.6)
  Top 0.254: U$3.P$4 53.97,35.06 54.47,34.56 | U$3.P$3 54.47,34.56 | 54.47,34.56 54.48,34.54 v55.98,34.54 55.98,32.31 54.76,31.09 52.48,31.09 51.53,32.04 U$3.P$36 | 31.19,34.67 22.15,34.67 7.62,20.14 A2.21 8.89,8.89 8.89,7.01 10.69,5.21 94.31,5.21 95.4,6.3 95.4,10.72 87.78,18.34 v68.89,18.34 | 31.19,34.67 37.63,34.67 C14.2 40.08,34.4 C13.2 40.24,34.56 42.16,34.56 | 42.16,34.56 U$3.P$25 41.49,34.56 41.48,34.54 41.48,35.28 v42.29,36.09 | U$3.P$24 42.66,35.06 42.16,34.56 | v3.2,16.66 4.85,18.31 v4.83,25.58 4.85,29.23 | 4.85,29.23 4.85,30.84 v3.71,31.98 v3.71,38.86 | v8.33,29.11 4.98,29.11 4.85,29.23 | v31.17,33.83 31.17,34.65 31.19,34.67
  Bottom 0.254: v42.29,36.09 54.43,36.09 v55.98,34.54 | U4.7 69.8,16.66 68.89,17.58 v68.89,18.34 | A2.21 4.65,13.13 -5V_SUPPLY.8 v3.2,16.66 | AVERAGER.6 5.03,25.4 v4.83,25.58 | v3.71,31.98 5.59,31.98 COMPARATOR.6 | R29.2 8.97,29.74 v8.33,29.11 | OFFSET.6 4.88,37.19 4.72,37.34 4.72,37.85 v3.71,38.86 | U5.7 33.33,20.93 33.68,21.29 33.68,31.32 v31.17,33.83